# Altium PCB dc_power_backup_module_v1.PcbDoc (part 2 of 4)
Units mil, origin at the board's own origin, x right, y up, seen from the top; angles counter-clockwise.
Board outline 3300 x 2890 mil, 2 copper layers (Top Layer, Bottom Layer); 44 components, 21 nets, 171 pads, 32 vias.
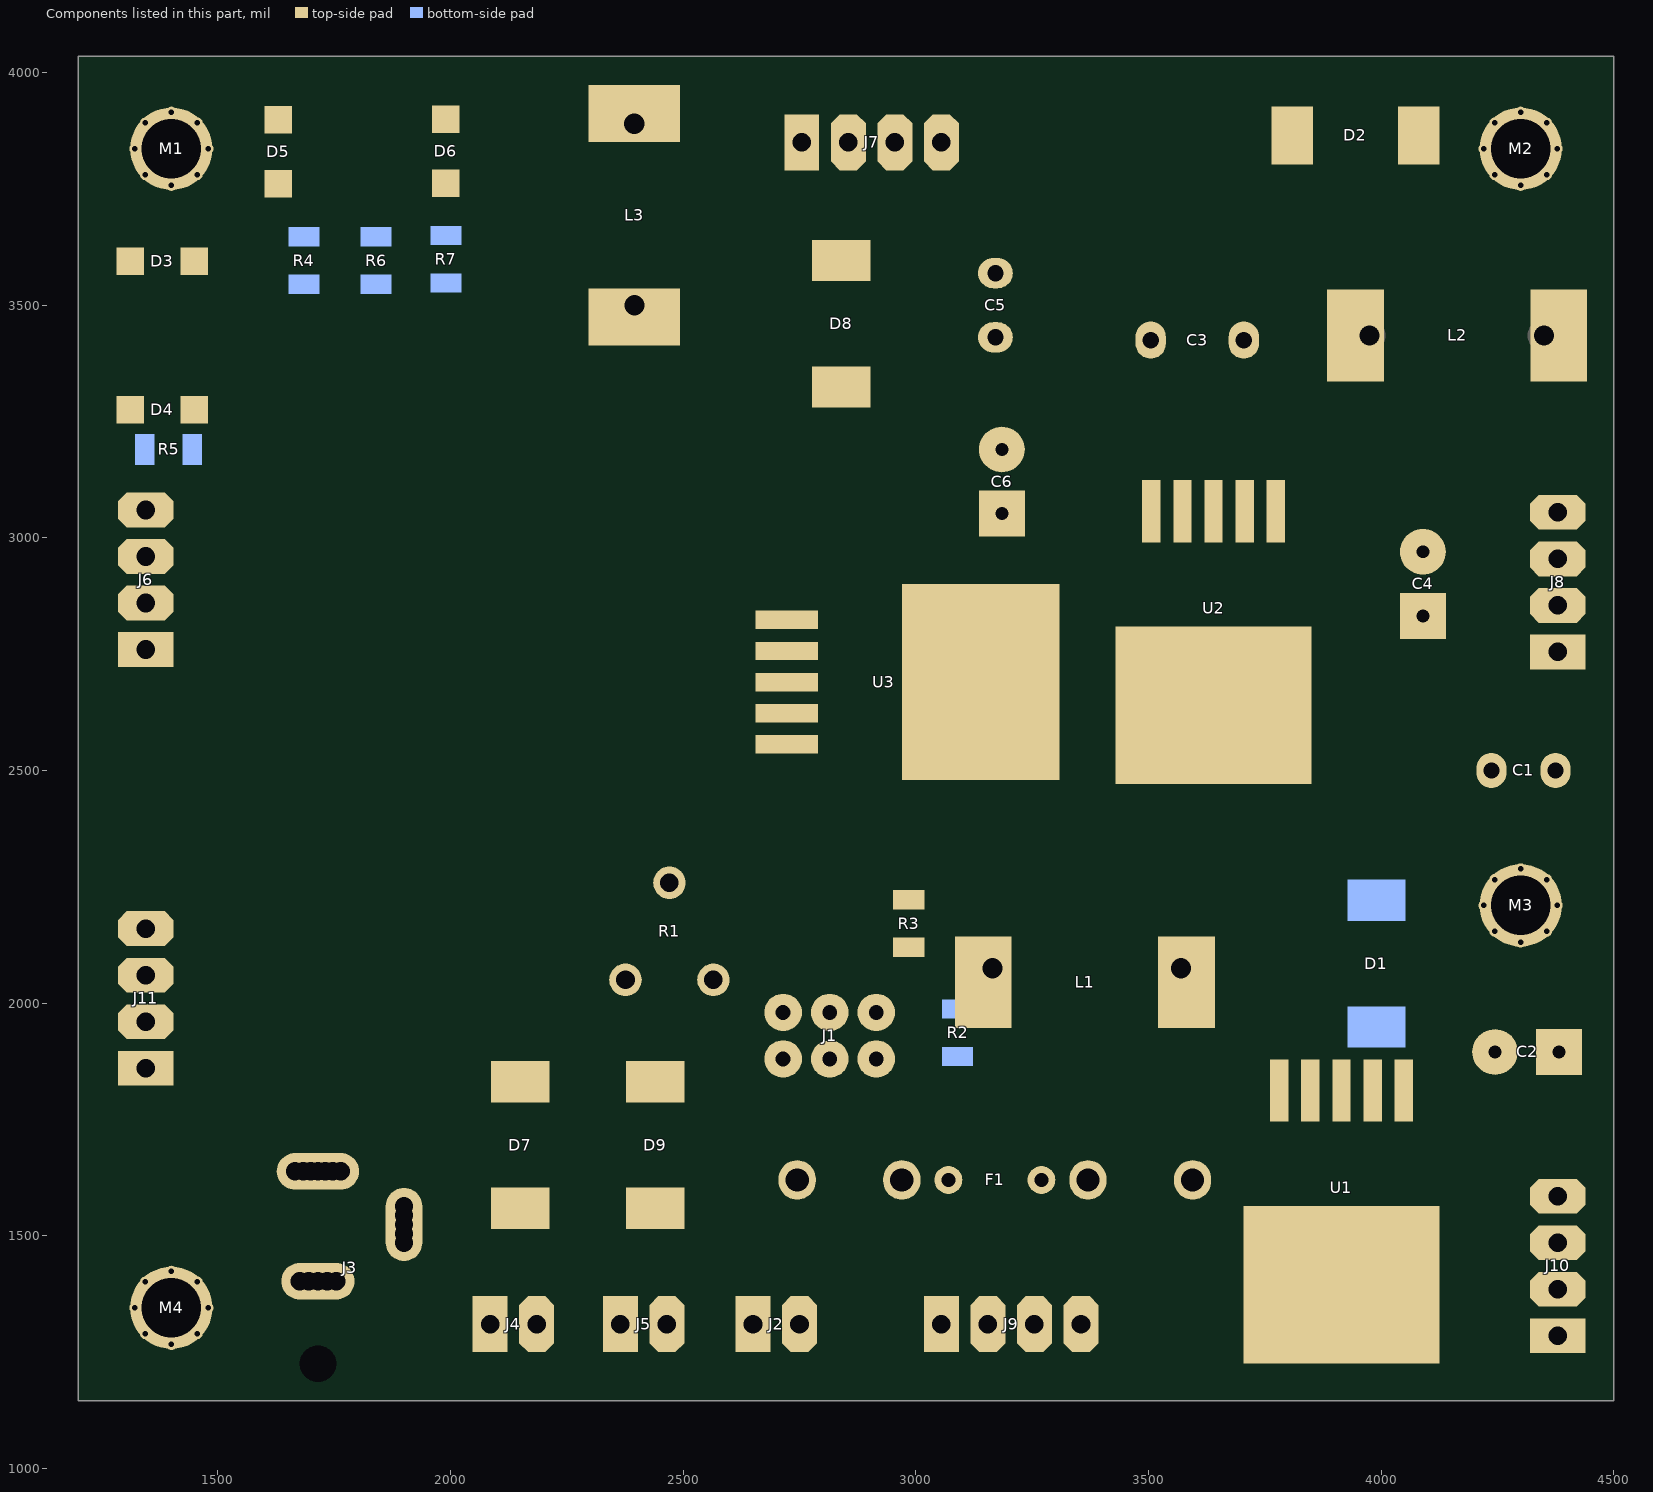
[diagram p2: the components of this part, seen from the top]

## Via types
v1: diameter 50, hole 28, Top Layer to Bottom Layer, 32 vias

## Nets (pads, with @x,y where several pads share a name; then routed paths per layer and width w, separated by ;. In a path a pad name is that pad's centre, name@x,y a point inside that pad or via, vN(x,y) a via of type N, cw(c..) or ccw(c..) an arc to the next point about the centre after c; other vN are vias at no path point) (continued)
copper on no net: (continued)
  Top Layer w0.3: 1926.2,2482.7 1930.7,2482.7 ; 1926.2,2483 1927.4,2483 ; 1926.5,2484.8 1927.1,2484.8 ; 1926.5,2485.1 1927.4,2485.1 ; 1926.5,2485.4 1927.4,2485.4 ; 1926.5,2485.7 1927.7,2485.7 ; 1926.5,2486 1927.7,2486 ; 1926.5,2486.3 1928,2486.3 ; 1926.5,2486.6 1928,2486.6 ; 1926.5,2486.9 1928.3,2486.9 ; 1926.5,2487.2 1928.6,2487.2 ; 1926.5,2487.5 1928.6,2487.5 ; 1926.8,2482.4 1933.7,2482.4 ; 1926.8,2487.8 1928.9,2487.8 ; 1926.8,2488.1 1928.9,2488.1 ; 1926.8,2488.4 1929.2,2488.4 ; 1926.8,2488.7 1929.5,2488.7 ; 1926.8,2489 1929.5,2489 ; 1926.8,2489.3 1929.8,2489.3 ; 1926.8,2489.6 1930.1,2489.6 ; 1926.8,2489.9 1930.1,2489.9 ; 1926.8,2490.2 1930.4,2490.2 ; 1926.8,2490.5 1930.7,2490.5 ; 1926.8,2490.8 1931,2490.8 ; 1927.1,2491.1 1931,2491.1 ; 1927.1,2491.4 1931.3,2491.4 ; 1927.1,2491.7 1931.6,2491.7 ; 1927.1,2492 1931.6,2492 ; 1927.1,2492.3 1931.9,2492.3 ; 1927.1,2492.6 1932.2,2492.6 ; 1927.1,2492.9 1932.5,2492.9 ; 1927.4,2482.1 1936.7,2482.1 ; 1927.4,2493.2 1932.8,2493.2 ; 1927.4,2493.5 1933.1,2493.5 ; 1927.4,2493.8 1933.1,2493.8 ; 1927.4,2494.1 1933.4,2494.1 ; 1927.4,2494.4 1933.7,2494.4 ; 1927.4,2494.7 1934,2494.7 ; 1927.7,2481.8 1940,2481.8 ; 1927.7,2495 1934.3,2495 ; 1927.7,2495.3 1934.6,2495.3 ; 1927.7,2495.6 1934.9,2495.6 ; 1927.7,2495.9 1935.5,2495.9 ; 1927.7,2496.2 1935.8,2496.2 ; 1927.7,2496.5 1936.1,2496.5 ; 1928,2496.8 1936.7,2496.8 ; 1928,2497.1 1937,2497.1 ; 1928,2497.4 1937.6,2497.4 ; 1928,2497.7 1938.2,2497.7 ; 1928,2498 1938.8,2498 ; 1928.3,2481.5 1943.3,2481.5 ; 1928.3,2498.3 1940,2498.3 ; 1928.3,2498.6 1967.3,2498.6 ; 1928.3,2498.9 1967.3,2498.9 ; 1928.3,2499.2 1967.3,2499.2 ; 1928.6,2499.5 1967,2499.5 ; 1928.6,2499.8 1967,2499.8 ; 1928.6,2500.1 1967,2500.1 ; 1928.6,2500.4 1966.7,2500.4 ; 1928.9,2481.2 1946.9,2481.2 ; 1928.9,2500.7 1966.7,2500.7 ; 1928.9,2501 1966.7,2501 ; 1928.9,2501.3 1966.4,2501.3 ; 1928.9,2501.6 1966.4,2501.6 ; 1929.2,2501.9 1966.1,2501.9 ; 1929.2,2502.2 1966.1,2502.2 ; 1929.2,2502.5 1966.1,2502.5 ; 1929.2,2502.8 1965.8,2502.8 ; 1929.5,2503.1 1965.8,2503.1 ; 1929.5,2503.4 1965.5,2503.4 ; 1929.5,2503.7 1965.5,2503.7 ; 1929.8,2480.9 1950.5,2480.9 ; 1929.8,2504 1965.5,2504 ; 1929.8,2504.3 1965.2,2504.3 ; 1929.8,2504.6 1965.2,2504.6 ; 1929.8,2504.9 1964.9,2504.9 ; 1930.1,2505.2 1964.9,2505.2 ; 1930.1,2505.5 1964.9,2505.5 ; 1930.1,2505.8 1964.6,2505.8 ; 1930.4,2480.6 1954.4,2480.6 ; 1930.4,2506.1 1964.6,2506.1 ; 1930.4,2506.4 1964.3,2506.4 ; 1930.4,2506.7 1964.3,2506.7 ; 1930.7,2507 1964.3,2507 ; 1930.7,2507.3 1964,2507.3 ; 1930.7,2507.6 1964,2507.6 ; 1931,2480.3 1972.4,2480.3 ; 1931,2507.9 1963.7,2507.9 ; 1931,2508.2 1963.7,2508.2 ; 1931,2508.5 1963.4,2508.5 ; 1931.3,2508.8 1963.4,2508.8 ; 1931.3,2509.1 1963.1,2509.1 ; 1931.6,2480 1972.4,2480 ; 1931.6,2509.4 1963.1,2509.4 ; 1931.6,2509.7 1962.8,2509.7 ; 1931.6,2510 1962.8,2510 ; 1931.9,2510.3 1962.5,2510.3 ; 1931.9,2510.6 1962.5,2510.6 ; 1932.2,2510.9 1962.2,2510.9 ; 1932.2,2511.2 1962.2,2511.2 ; 1932.2,2511.5 1961.9,2511.5 ; 1932.5,2479.7 1973.9,2479.7 ; 1932.5,2511.8 1961.9,2511.8 ; 1932.5,2512.1 1961.6,2512.1 ; 1932.8,2512.4 1961.6,2512.4 ; 1932.8,2512.7 1961.3,2512.7 ; 1933.1,2479.4 2066.6,2479.4 ; 1933.1,2513 1961,2513 ; 1933.1,2513.3 1961,2513.3 ; 1933.1,2513.6 1960.7,2513.6 ; 1933.4,2513.9 1960.7,2513.9 ; 1933.4,2514.2 1960.4,2514.2 ; 1933.7,2514.5 1960.4,2514.5 ; 1933.7,2514.8 1960.1,2514.8 ; 1934,2479.1 2065.1,2479.1 ; 1934,2515.1 1959.8,2515.1 ; 1934,2515.4 1959.8,2515.4 ; 1934.3,2515.7 1959.5,2515.7 ; 1934.6,2478.8 2063.6,2478.8 ; 1934.6,2516 1959.2,2516 ; 1934.6,2516.3 1959.2,2516.3 ; 1934.9,2516.6 1958.9,2516.6 ; 1934.9,2516.9 1958.6,2516.9 ; 1935.2,2517.2 1958.3,2517.2 ; 1935.2,2517.5 1958.3,2517.5 ; 1935.5,2478.5 2062.4,2478.5 ; 1935.5,2517.8 1958,2517.8 ; 1935.8,2518.1 1957.7,2518.1 ; 1935.8,2518.4 1957.4,2518.4 ; 1936.1,2518.7 1957.4,2518.7 ; 1936.4,2478.2 2060.9,2478.2 ; 1936.4,2519 1957.1,2519 ; 1936.4,2519.3 1956.8,2519.3 ; 1936.7,2519.6 1956.5,2519.6 ; 1937,2477.9 2059.4,2477.9 ; 1937,2519.9 1956.2,2519.9 ; 1937.3,2520.2 1955.9,2520.2 ; 1937.3,2520.5 1955.6,2520.5 ; 1937.6,2520.8 1955.3,2520.8 ; 1937.9,2477.6 2057.9,2477.6 ; 1937.9,2521.1 1955,2521.1 ; 1938.2,2521.4 1954.7,2521.4 ; 1938.5,2521.7 1954.4,2521.7 ; 1938.8,2477.3 2056.4,2477.3 ; 1938.8,2522 1954.1,2522 ; 1939.1,2522.3 1953.8,2522.3 ; 1939.4,2522.6 1953.2,2522.6 ; 1939.7,2477 2054.6,2477 ; 1939.7,2522.9 1952.9,2522.9 ; 1940,2523.2 1952.6,2523.2 ; 1940.6,2523.5 1952,2523.5 ; 1940.9,2476.7 2053.1,2476.7 ; 1940.9,2523.8 1951.7,2523.8 ; 1941.5,2524.1 1951.1,2524.1 ; 1942.1,2476.4 2051,2476.4 ; 1942.1,2498.3 1967.6,2498.3 ; 1942.1,2524.4 1950.5,2524.4 ; 1942.7,2524.7 1949.6,2524.7 ; 1943.3,2476.1 2048.9,2476.1 ; 1943.3,2498 1967.6,2498 ; 1943.3,2525 1949,2525 ; 1943.9,2497.7 1967.6,2497.7 ; 1944.5,2497.4 1967.9,2497.4 ; 1944.5,2525.3 1947.5,2525.3 ; 1944.8,2475.8 2046.8,2475.8 ; 1945.1,2497.1 1967.9,2497.1 ; 1945.7,2496.8 1967.9,2496.8 ; 1946,2496.5 1968.2,2496.5 ; 1946.3,2475.5 2044.4,2475.5 ; 1946.3,2496.2 1968.2,2496.2 ; 1946.6,2495.9 1968.2,2495.9 ; 1947.2,2495.6 1968.5,2495.6 ; 1947.5,2495.3 1968.5,2495.3 ; 1947.8,2495 1968.5,2495 ; 1948.1,2475.2 2041.7,2475.2 ; 1948.1,2494.4 1968.8,2494.4 ; 1948.1,2494.7 1968.8,2494.7 ; 1948.4,2494.1 1968.8,2494.1 ; 1948.7,2493.8 1968.8,2493.8 ; 1949,2493.5 1969.1,2493.5 ; 1949.3,2493.2 1969.1,2493.2 ; 1949.6,2492.9 1969.1,2492.9 ; 1949.9,2474.9 2039,2474.9 ; 1949.9,2492.3 1969.4,2492.3 ; 1949.9,2492.6 1969.4,2492.6 ; 1950.2,2492 1969.4,2492 ; 1950.5,2491.7 1969.7,2491.7 ; 1950.8,2491.1 1969.7,2491.1 ; 1950.8,2491.4 1969.7,2491.4 ; 1951.1,2490.8 1969.7,2490.8 ; 1951.4,2490.2 1970,2490.2 ; 1951.4,2490.5 1970,2490.5 ; 1951.7,2489.9 1970,2489.9 ; 1952,2489.6 1970,2489.6 ; 1952.3,2474.6 2036.3,2474.6 ; 1952.3,2489 1970.3,2489 ; 1952.3,2489.3 1970.3,2489.3 ; 1952.6,2488.4 1970.6,2488.4 ; 1952.6,2488.7 1970.3,2488.7 ; 1952.9,2488.1 1970.6,2488.1 ; 1953.2,2487.5 1970.6,2487.5 ; 1953.2,2487.8 1970.6,2487.8 ; 1953.5,2487.2 1970.9,2487.2 ; 1953.8,2486.6 1970.9,2486.6 ; 1953.8,2486.9 1970.9,2486.9 ; 1954.1,2486 1971.2,2486 ; 1954.1,2486.3 1970.9,2486.3 ; 1954.4,2485.7 1971.2,2485.7 ; 1954.7,2474.3 2033,2474.3 ; 1954.7,2485.1 1971.2,2485.1 ; 1954.7,2485.4 1971.2,2485.4 ; 1955,2484.5 1971.5,2484.5 ; 1955,2484.8 1971.5,2484.8 ; 1955.3,2483.9 1971.5,2483.9 ; 1955.3,2484.2 1971.5,2484.2 ; 1955.6,2483.6 1971.8,2483.6 ; 1955.9,2483 1971.8,2483 ; 1955.9,2483.3 1971.8,2483.3 ; 1956.2,2482.4 1972.1,2482.4 ; 1956.2,2482.7 1971.8,2482.7 ; 1956.5,2481.8 1972.1,2481.8 ; 1956.5,2482.1 1972.1,2482.1 ; 1956.8,2481.2 1972.4,2481.2 ; 1956.8,2481.5 1972.1,2481.5 ; 1957.1,2480.6 1972.4,2480.6 ; 1957.1,2480.9 1972.4,2480.9 ; 1957.4,2474 2029.7,2474 ; 1960.4,2473.4 2021.9,2473.4 ; 1960.4,2473.7 2026.1,2473.7 ; 1960.7,2472.5 1974.2,2472.5 ; 1960.7,2472.8 1973.9,2472.8 ; 1960.7,2473.1 2017.4,2473.1 ; 1961,2471.6 1974.2,2471.6 ; 1961,2471.9 1974.2,2471.9 ; 1961,2472.2 1974.2,2472.2 ; 1961.3,2471 1974.5,2471 ; 1961.3,2471.3 1974.2,2471.3 ; 1961.6,2470.1 1974.5,2470.1 ; 1961.6,2470.4 1974.5,2470.4 ; 1961.6,2470.7 1974.5,2470.7 ; 1961.9,2469.2 1974.8,2469.2 ; 1961.9,2469.5 1974.8,2469.5 ; 1961.9,2469.8 1974.5,2469.8 ; 1962.2,2468.3 1974.8,2468.3 ; 1962.2,2468.6 1974.8,2468.6 ; 1962.2,2468.9 1974.8,2468.9 ; 1962.5,2467.4 1975.1,2467.4 ; 1962.5,2467.7 1975.1,2467.7 ; 1962.5,2468 1974.8,2468 ; 1962.8,2466.5 1975.1,2466.5 ; 1962.8,2466.8 1975.1,2466.8 ; 1962.8,2467.1 1975.1,2467.1 ; 1963.1,2465.6 1975.4,2465.6 ; 1963.1,2465.9 1975.4,2465.9 ; 1963.1,2466.2 1975.1,2466.2 ; 1963.4,2464.7 1975.4,2464.7 ; 1963.4,2465 1975.4,2465 ; 1963.4,2465.3 1975.4,2465.3 ; 1963.7,2463.8 1975.7,2463.8 ; 1963.7,2464.1 1975.7,2464.1 ; 1963.7,2464.4 1975.4,2464.4 ; 1964,2462.9 1975.7,2462.9 ; 1964,2463.2 1975.7,2463.2 ; 1964,2463.5 1975.7,2463.5 ; 1964.3,2461.7 1976,2461.7 ; 1964.3,2462 1976,2462 ; 1964.3,2462.3 1976,2462.3 ; 1964.3,2462.6 1975.7,2462.6 ; 1964.6,2460.8 1976,2460.8 ; 1964.6,2461.1 1976,2461.1 ; 1964.6,2461.4 1976,2461.4 ; 1964.9,2459.6 1976.3,2459.6 ; 1964.9,2459.9 1976.3,2459.9 ; 1964.9,2460.2 1976.3,2460.2 ; 1964.9,2460.5 1976.3,2460.5 ; 1965.2,2458.7 1976.6,2458.7 ; 1965.2,2459 1976.3,2459 ; 1965.2,2459.3 1976.3,2459.3 ; 1965.5,2457.5 1976.6,2457.5 ; 1965.5,2457.8 1976.6,2457.8 ; 1965.5,2458.1 1976.6,2458.1 ; 1965.5,2458.4 1976.6,2458.4 ; 1965.8,2456.3 1976.9,2456.3 ; 1965.8,2456.6 1976.9,2456.6 ; 1965.8,2456.9 1976.6,2456.9 ; 1965.8,2457.2 1976.6,2457.2 ; 1966.1,2455.1 1976.9,2455.1 ; 1966.1,2455.4 1976.9,2455.4 ; 1966.1,2455.7 1976.9,2455.7 ; 1966.1,2456 1976.9,2456 ; 1966.4,2453.9 1977.2,2453.9 ; 1966.4,2454.2 1977.2,2454.2 ; 1966.4,2454.5 1977.2,2454.5 ; 1966.4,2454.8 1976.9,2454.8 ; 1966.7,2452.7 1977.2,2452.7 ; 1966.7,2453 1977.2,2453 ; 1966.7,2453.3 1977.2,2453.3 ; 1966.7,2453.6 1977.2,2453.6 ; 1967,2451.5 1977.5,2451.5 ; 1967,2451.8 1977.5,2451.8 ; 1967,2452.1 1977.5,2452.1 ; 1967,2452.4 1977.5,2452.4 ; 1967.3,2450.3 1977.5,2450.3 ; 1967.3,2450.6 1977.5,2450.6 ; 1967.3,2450.9 1977.5,2450.9 ; 1967.3,2451.2 1977.5,2451.2 ; 1967.6,2448.8 1977.8,2448.8 ; 1967.6,2449.1 1977.8,2449.1 ; 1967.6,2449.4 1977.8,2449.4 ; 1967.6,2449.7 1977.8,2449.7 ; 1967.6,2450 1977.8,2450 ; 1967.9,2447.6 1978.1,2447.6 ; 1967.9,2447.9 1977.8,2447.9 ; 1967.9,2448.2 1977.8,2448.2 ; 1967.9,2448.5 1977.8,2448.5 ; 1968.2,2446.1 1978.1,2446.1 ; 1968.2,2446.4 1978.1,2446.4 ; 1968.2,2446.7 1978.1,2446.7 ; 1968.2,2447 1978.1,2447 ; 1968.2,2447.3 1978.1,2447.3 ; 1968.5,2444.9 1978.4,2444.9 ; 1968.5,2445.2 1978.4,2445.2 ; 1968.5,2445.5 1978.1,2445.5 ; 1968.5,2445.8 1978.1,2445.8 ; 1968.8,2443.4 1978.4,2443.4 ; 1968.8,2443.7 1978.4,2443.7 ; 1968.8,2444 1978.4,2444 ; 1968.8,2444.3 1978.4,2444.3 ; 1968.8,2444.6 1978.4,2444.6 ; 1969.1,2441.9 1978.7,2441.9 ; 1969.1,2442.2 1978.7,2442.2 ; 1969.1,2442.5 1978.7,2442.5 ; 1969.1,2442.8 1978.7,2442.8 ; 1969.1,2443.1 1978.4,2443.1 ; 1969.4,2440.1 1978.7,2440.1 ; 1969.4,2440.4 1978.7,2440.4 ; 1969.4,2440.7 1978.7,2440.7 ; 1969.4,2441 1978.7,2441 ; 1969.4,2441.3 1978.7,2441.3 ; 1969.4,2441.6 1978.7,2441.6 ; 1969.7,2438.6 1979,2438.6 ; 1969.7,2438.9 1979,2438.9 ; 1969.7,2439.2 1979,2439.2 ; 1969.7,2439.5 1979,2439.5 ; 1969.7,2439.8 1979,2439.8 ; 1970,2437.1 1979.3,2437.1 ; 1970,2437.4 1979,2437.4 ; 1970,2437.7 1979,2437.7 ; 1970,2438 1979,2438 ; 1970,2438.3 1979,2438.3 ; 1970.3,2435.3 1979.3,2435.3 ; 1970.3,2435.6 1979.3,2435.6 ; 1970.3,2435.9 1979.3,2435.9 ; 1970.3,2436.2 1979.3,2436.2 ; 1970.3,2436.5 1979.3,2436.5 ; 1970.3,2436.8 1979.3,2436.8 ; 1970.6,2433.5 1979.6,2433.5 ; 1970.6,2433.8 1979.6,2433.8 ; 1970.6,2434.1 1979.6,2434.1 ; 1970.6,2434.4 1979.3,2434.4 ; 1970.6,2434.7 1979.3,2434.7 ; 1970.6,2435 1979.3,2435 ; 1970.9,2431.7 1979.6,2431.7 ; 1970.9,2432 1979.6,2432 ; 1970.9,2432.3 1979.6,2432.3 ; 1970.9,2432.6 1979.6,2432.6 ; 1970.9,2432.9 1979.6,2432.9 ; 1970.9,2433.2 1979.6,2433.2 ; 1971.2,2328.5 1971.5,2328.5 ; 1971.2,2328.8 1971.5,2328.8 ; 1971.2,2329.1 1971.8,2329.1 ; 1971.2,2329.4 1971.8,2329.4 ; 1971.2,2329.7 1972.1,2329.7 ; 1971.2,2330 1972.1,2330 ; 1971.2,2330.3 1972.4,2330.3 ; 1971.2,2330.6 1972.4,2330.6 ; 1971.2,2330.9 1972.7,2330.9 ; 1971.2,2331.2 1972.7,2331.2 ; 1971.2,2331.5 1973,2331.5 ; 1971.2,2331.8 1973,2331.8 ; 1971.2,2332.1 1973,2332.1 ; 1971.2,2332.4 1973.3,2332.4 ; 1971.2,2332.7 1973.3,2332.7 ; 1971.2,2333 1973.6,2333 ; 1971.2,2429.9 1979.9,2429.9 ; 1971.2,2430.2 1979.9,2430.2 ; 1971.2,2430.5 1979.9,2430.5 ; 1971.2,2430.8 1979.9,2430.8 ; 1971.2,2431.1 1979.6,2431.1 ; 1971.2,2431.4 1979.6,2431.4 ; 1971.5,2333.3 1973.6,2333.3 ; 1971.5,2333.6 1973.6,2333.6 ; 1971.5,2333.9 1973.9,2333.9 ; 1971.5,2334.2 1973.9,2334.2 ; 1971.5,2334.5 1973.9,2334.5 ; 1971.5,2334.8 1974.2,2334.8 ; 1971.5,2335.1 1974.2,2335.1 ; 1971.5,2427.8 1979.9,2427.8 ; 1971.5,2428.1 1979.9,2428.1 ; 1971.5,2428.4 1979.9,2428.4 ; 1971.5,2428.7 1979.9,2428.7 ; 1971.5,2429 1979.9,2429 ; 1971.5,2429.3 1979.9,2429.3 ; 1971.5,2429.6 1979.9,2429.6 ; 1971.8,2335.4 1974.2,2335.4 ; 1971.8,2335.7 1974.5,2335.7 ; 1971.8,2336 1974.5,2336 ; 1971.8,2336.3 1974.5,2336.3 ; 1971.8,2336.6 1974.8,2336.6 ; 1971.8,2336.9 1974.8,2336.9 ; 1971.8,2425.7 1980.2,2425.7 ; 1971.8,2426 1980.2,2426 ; 1971.8,2426.3 1980.2,2426.3 ; 1971.8,2426.6 1980.2,2426.6 ; 1971.8,2426.9 1980.2,2426.9 ; 1971.8,2427.2 1980.2,2427.2 ; 1971.8,2427.5 1979.9,2427.5 ; 1972.1,2337.2 1974.8,2337.2 ; 1972.1,2337.5 1975.1,2337.5 ; 1972.1,2337.8 1975.1,2337.8 ; 1972.1,2338.1 1975.1,2338.1 ; 1972.1,2338.4 1975.1,2338.4 ; 1972.1,2338.7 1975.4,2338.7 ; 1972.1,2423.6 1980.2,2423.6 ; 1972.1,2423.9 1980.2,2423.9 ; 1972.1,2424.2 1980.2,2424.2 ; 1972.1,2424.5 1980.2,2424.5 ; 1972.1,2424.8 1980.2,2424.8 ; 1972.1,2425.1 1980.2,2425.1 ; 1972.1,2425.4 1980.2,2425.4 ; 1972.4,2339 1975.4,2339 ; 1972.4,2339.3 1975.4,2339.3 ; 1972.4,2339.6 1975.4,2339.6 ; 1972.4,2339.9 1975.7,2339.9 ; 1972.4,2340.2 1975.7,2340.2 ; 1972.4,2340.5 1975.7,2340.5 ; 1972.4,2421.5 1980.5,2421.5 ; 1972.4,2421.8 1980.5,2421.8 ; 1972.4,2422.1 1980.5,2422.1 ; 1972.4,2422.4 1980.5,2422.4 ; 1972.4,2422.7 1980.5,2422.7 ; 1972.4,2423 1980.5,2423 ; 1972.4,2423.3 1980.5,2423.3 ; 1972.7,2340.8 1975.7,2340.8 ; 1972.7,2341.1 1976,2341.1 ; 1972.7,2341.4 1976,2341.4 ; 1972.7,2341.7 1976,2341.7 ; 1972.7,2342 1976,2342 ; 1972.7,2342.3 1976.3,2342.3 ; 1972.7,2419.1 1980.5,2419.1 ; 1972.7,2419.4 1980.5,2419.4 ; 1972.7,2419.7 1980.5,2419.7 ; 1972.7,2420 1980.5,2420 ; 1972.7,2420.3 1980.5,2420.3 ; 1972.7,2420.6 1980.5,2420.6 ; 1972.7,2420.9 1980.5,2420.9 ; 1972.7,2421.2 1980.5,2421.2 ; 1973,2342.6 1976.3,2342.6 ; 1973,2342.9 1976.3,2342.9 ; 1973,2343.2 1976.3,2343.2 ; 1973,2343.5 1976.6,2343.5 ; 1973,2343.8 1976.6,2343.8 ; 1973,2344.1 1976.6,2344.1 ; 1973,2416.7 1980.8,2416.7 ; 1973,2417 1980.8,2417 ; 1973,2417.3 1980.8,2417.3 ; 1973,2417.6 1980.8,2417.6 ; 1973,2417.9 1980.8,2417.9 ; 1973,2418.2 1980.8,2418.2 ; 1973,2418.5 1980.8,2418.5 ; 1973,2418.8 1980.8,2418.8 ; 1973.3,2344.4 1976.6,2344.4 ; 1973.3,2344.7 1976.6,2344.7 ; 1973.3,2345 1976.9,2345 ; 1973.3,2345.3 1976.9,2345.3 ; 1973.3,2345.6 1976.9,2345.6 ; 1973.3,2345.9 1976.9,2345.9 ; 1973.3,2414 1980.8,2414 ; 1973.3,2414.3 1980.8,2414.3 ; 1973.3,2414.6 1980.8,2414.6 ; 1973.3,2414.9 1980.8,2414.9 ; 1973.3,2415.2 1980.8,2415.2 ; 1973.3,2415.5 1980.8,2415.5 ; 1973.3,2415.8 1980.8,2415.8 ; 1973.3,2416.1 1980.8,2416.1 ; 1973.3,2416.4 1980.8,2416.4 ; 1973.6,2346.2 1976.9,2346.2 ; 1973.6,2346.5 1977.2,2346.5 ; 1973.6,2346.8 1977.2,2346.8 ; 1973.6,2347.1 1977.2,2347.1 ; 1973.6,2347.4 1977.2,2347.4 ; 1973.6,2347.7 1977.2,2347.7 ; 1973.6,2411.3 1981.1,2411.3 ; 1973.6,2411.6 1981.1,2411.6 ; 1973.6,2411.9 1981.1,2411.9 ; 1973.6,2412.2 1981.1,2412.2 ; 1973.6,2412.5 1981.1,2412.5 ; 1973.6,2412.8 1981.1,2412.8 ; 1973.6,2413.1 1981.1,2413.1 ; 1973.6,2413.4 1981.1,2413.4 ; 1973.6,2413.7 1981.1,2413.7 ; 1973.9,2348 1977.5,2348 ; 1973.9,2348.3 1977.5,2348.3 ; 1973.9,2348.6 1977.5,2348.6 ; 1973.9,2348.9 1977.5,2348.9 ; 1973.9,2349.2 1977.5,2349.2 ; 1973.9,2349.5 1977.5,2349.5 ; 1973.9,2349.8 1977.8,2349.8 ; 1973.9,2408.3 1981.1,2408.3 ; 1973.9,2408.6 1981.1,2408.6 ; 1973.9,2408.9 1981.1,2408.9 ; 1973.9,2409.2 1981.1,2409.2 ; 1973.9,2409.5 1981.1,2409.5 ; 1973.9,2409.8 1981.1,2409.8 ; 1973.9,2410.1 1981.1,2410.1 ; 1973.9,2410.4 1981.1,2410.4 ; 1973.9,2410.7 1981.1,2410.7 ; 1973.9,2411 1981.1,2411 ; 1974.2,2350.1 1977.8,2350.1 ; 1974.2,2350.4 1977.8,2350.4 ; 1974.2,2350.7 1977.8,2350.7 ; 1974.2,2351 1977.8,2351 ; 1974.2,2351.3 1977.8,2351.3 ; 1974.2,2351.6 1978.1,2351.6 ; 1974.2,2351.9 1978.1,2351.9 ; 1974.2,2352.2 1978.1,2352.2 ; 1974.2,2405 1981.4,2405 ; 1974.2,2405.3 1981.4,2405.3 ; 1974.2,2405.6 1981.4,2405.6 ; 1974.2,2405.9 1981.4,2405.9 ; 1974.2,2406.2 1981.4,2406.2 ; 1974.2,2406.5 1981.4,2406.5 ; 1974.2,2406.8 1981.4,2406.8 ; 1974.2,2407.1 1981.1,2407.1 ; 1974.2,2407.4 1981.1,2407.4 ; 1974.2,2407.7 1981.1,2407.7 ; 1974.2,2408 1981.1,2408 ; 1974.5,2352.5 1978.1,2352.5 ; 1974.5,2352.8 1978.1,2352.8 ; 1974.5,2353.1 1978.1,2353.1 ; 1974.5,2353.4 1978.4,2353.4 ; 1974.5,2353.7 1978.4,2353.7 ; 1974.5,2354 1978.4,2354 ; 1974.5,2354.3 1978.4,2354.3 ; 1974.5,2354.6 1978.4,2354.6 ; 1974.5,2354.9 1978.4,2354.9 ; 1974.5,2355.2 1978.4,2355.2 ; 1974.5,2355.5 1978.7,2355.5 ; 1974.5,2401.4 1981.4,2401.4 ; 1974.5,2401.7 1981.4,2401.7 ; 1974.5,2402 1981.4,2402 ; 1974.5,2402.3 1981.4,2402.3 ; 1974.5,2402.6 1981.4,2402.6 ; 1974.5,2402.9 1981.4,2402.9 ; 1974.5,2403.2 1981.4,2403.2 ; 1974.5,2403.5 1981.4,2403.5 ; 1974.5,2403.8 1981.4,2403.8 ; 1974.5,2404.1 1981.4,2404.1 ; 1974.5,2404.4 1981.4,2404.4 ; 1974.5,2404.7 1981.4,2404.7 ; 1974.8,2355.8 1978.7,2355.8 ; 1974.8,2356.1 1978.7,2356.1 ; 1974.8,2356.4 1978.7,2356.4 ; 1974.8,2356.7 1978.7,2356.7 ; 1974.8,2357 1978.7,2357 ; 1974.8,2357.3 1978.7,2357.3 ; 1974.8,2357.6 1979,2357.6 ; 1974.8,2357.9 1979,2357.9 ; 1974.8,2358.2 1979,2358.2 ; 1974.8,2358.5 1979,2358.5 ; 1974.8,2358.8 1979,2358.8 ; 1974.8,2359.1 1979,2359.1 ; 1974.8,2359.4 1979,2359.4 ; 1974.8,2359.7 1979,2359.7 ; 1974.8,2360 1979.3,2360 ; 1974.8,2360.3 1979.3,2360.3 ; 1974.8,2397.2 1981.4,2397.2 ; 1974.8,2397.5 1981.4,2397.5 ; 1974.8,2397.8 1981.4,2397.8 ; 1974.8,2398.1 1981.4,2398.1 ; 1974.8,2398.4 1981.4,2398.4 ; 1974.8,2398.7 1981.4,2398.7 ; 1974.8,2399 1981.4,2399 ; 1974.8,2399.3 1981.4,2399.3 ; 1974.8,2399.6 1981.4,2399.6 ; 1974.8,2399.9 1981.4,2399.9 ; 1974.8,2400.2 1981.4,2400.2 ; 1974.8,2400.5 1981.4,2400.5 ; 1974.8,2400.8 1981.4,2400.8 ; 1974.8,2401.1 1981.4,2401.1 ; 1975.1,2360.6 1979.3,2360.6 ; 1975.1,2360.9 1979.3,2360.9 ; 1975.1,2361.2 1979.3,2361.2 ; 1975.1,2361.5 1979.3,2361.5 ; 1975.1,2361.8 1979.3,2361.8 ; 1975.1,2362.1 1979.3,2362.1 ; 1975.1,2362.4 1979.6,2362.4 ; 1975.1,2362.7 1979.6,2362.7 ; 1975.1,2363 1979.6,2363 ; 1975.1,2363.3 1979.6,2363.3 ; 1975.1,2363.6 1979.6,2363.6 ; 1975.1,2363.9 1979.6,2363.9 ; 1975.1,2364.2 1979.6,2364.2 ; 1975.1,2364.5 1979.6,2364.5 ; 1975.1,2364.8 1979.6,2364.8 ; 1975.1,2365.1 1979.9,2365.1 ; 1975.1,2365.4 1979.9,2365.4 ; 1975.1,2365.7 1979.9,2365.7 ; 1975.1,2366 1979.9,2366 ; 1975.1,2366.3 1979.9,2366.3 ; 1975.1,2391.8 1981.4,2391.8 ; 1975.1,2392.1 1981.4,2392.1 ; 1975.1,2392.4 1981.4,2392.4 ; 1975.1,2392.7 1981.4,2392.7 ; 1975.1,2393 1981.4,2393 ; 1975.1,2393.3 1981.4,2393.3 ; 1975.1,2393.6 1981.4,2393.6 ; 1975.1,2393.9 1981.4,2393.9 ; 1975.1,2394.2 1981.4,2394.2 ; 1975.1,2394.5 1981.4,2394.5 ; 1975.1,2394.8 1981.4,2394.8 ; 1975.1,2395.1 1981.4,2395.1 ; 1975.1,2395.4 1981.4,2395.4 ; 1975.1,2395.7 1981.4,2395.7 ; 1975.1,2396 1981.4,2396 ; 1975.1,2396.3 1981.4,2396.3 ; 1975.1,2396.6 1981.4,2396.6 ; 1975.1,2396.9 1981.4,2396.9 ; 1975.4,2366.6 1979.9,2366.6 ; 1975.4,2366.9 1979.9,2366.9 ; 1975.4,2367.2 1979.9,2367.2 ; 1975.4,2367.5 1979.9,2367.5 ; 1975.4,2367.8 1979.9,2367.8 ; 1975.4,2368.1 1980.2,2368.1 ; 1975.4,2368.4 1980.2,2368.4 ; 1975.4,2368.7 1980.2,2368.7 ; 1975.4,2369 1980.2,2369 ; 1975.4,2369.3 1980.2,2369.3 ; 1975.4,2369.6 1980.2,2369.6 ; 1975.4,2369.9 1980.2,2369.9 ; 1975.4,2370.2 1980.2,2370.2 ; 1975.4,2370.5 1980.2,2370.5 ; 1975.4,2370.8 1980.2,2370.8 ; 1975.4,2371.1 1980.2,2371.1 ; 1975.4,2371.4 1980.2,2371.4 ; 1975.4,2371.7 1980.5,2371.7 ; 1975.4,2372 1980.5,2372 ; 1975.4,2372.3 1980.5,2372.3 ; 1975.4,2372.6 1980.5,2372.6 ; 1975.4,2372.9 1980.5,2372.9 ; 1975.4,2373.2 1980.5,2373.2 ; 1975.4,2373.5 1980.5,2373.5 ; 1975.4,2373.8 1980.5,2373.8 ; 1975.4,2374.1 1980.5,2374.1 ; 1975.4,2374.4 1980.5,2374.4 ; 1975.4,2374.7 1980.5,2374.7 ; 1975.4,2375 1980.5,2375 ; 1975.4,2375.3 1980.8,2375.3 ; 1975.4,2375.6 1980.8,2375.6 ; 1975.4,2375.9 1980.8,2375.9 ; 1975.4,2376.2 1980.8,2376.2 ; 1975.4,2376.5 1980.8,2376.5 ; 1975.4,2376.8 1980.8,2376.8 ; 1975.4,2377.1 1980.8,2377.1 ; 1975.4,2377.4 1980.8,2377.4 ; 1975.4,2377.7 1980.8,2377.7 ; 1975.4,2378 1980.8,2378 ; 1975.4,2378.3 1980.8,2378.3 ; 1975.4,2378.6 1980.8,2378.6 ; 1975.4,2378.9 1980.8,2378.9 ; 1975.4,2379.2 1980.8,2379.2 ; 1975.4,2379.5 1980.8,2379.5 ; 1975.4,2379.8 1981.1,2379.8 ; 1975.4,2380.1 1981.1,2380.1 ; 1975.4,2380.4 1981.1,2380.4 ; 1975.4,2380.7 1981.1,2380.7 ; 1975.4,2381 1981.1,2381 ; 1975.4,2381.3 1981.1,2381.3 ; 1975.4,2381.6 1981.1,2381.6 ; 1975.4,2381.9 1981.1,2381.9 ; 1975.4,2382.2 1981.1,2382.2 ; 1975.4,2382.5 1981.1,2382.5 ; 1975.4,2382.8 1981.1,2382.8 ; 1975.4,2383.1 1981.1,2383.1 ; 1975.4,2383.4 1981.1,2383.4 ; 1975.4,2383.7 1981.1,2383.7 ; 1975.4,2384 1981.1,2384 ; 1975.4,2384.3 1981.1,2384.3 ; 1975.4,2384.6 1981.1,2384.6 ; 1975.4,2384.9 1981.1,2384.9 ; 1975.4,2385.2 1981.1,2385.2 ; 1975.4,2385.5 1981.1,2385.5 ; 1975.4,2385.8 1981.4,2385.8 ; 1975.4,2386.1 1981.4,2386.1 ; 1975.4,2386.4 1981.4,2386.4 ; 1975.4,2386.7 1981.4,2386.7 ; 1975.4,2387 1981.4,2387 ; 1975.4,2387.3 1981.4,2387.3 ; 1975.4,2387.6 1981.4,2387.6 ; 1975.4,2387.9 1981.4,2387.9 ; 1975.4,2388.2 1981.4,2388.2 ; 1975.4,2388.5 1981.4,2388.5 ; 1975.4,2388.8 1981.4,2388.8 ; 1975.4,2389.1 1981.4,2389.1 ; 1975.4,2389.4 1981.4,2389.4 ; 1975.4,2389.7 1981.4,2389.7 ; 1975.4,2390 1981.4,2390 ; 1975.4,2390.3 1981.4,2390.3 ; 1975.4,2390.6 1981.4,2390.6 ; 1975.4,2390.9 1981.4,2390.9 ; 1975.4,2391.2 1981.4,2391.2 ; 1975.4,2391.5 1981.4,2391.5 ; 1976,2472.8 2012,2472.8 ; 1979,2463.5 1980.8,2463.5 ; 1979.3,2463.2 1984.1,2463.2 ; 1979.9,2462.9 1987.4,2462.9 ; 1980.5,2462.6 1990.7,2462.6 ; 1981.1,2462.3 1994.6,2462.3 ; 1981.7,2462 1998.5,2462 ; 1982.6,2461.7 2003.6,2461.7 ; 1982.9,2479.7 2067.8,2479.7 ; 1983.5,2461.4 2011.1,2461.4 ; 1984.4,2461.1 2124.2,2461.1 ; 1985.3,2460.8 2122.7,2460.8 ; 1986.5,2460.5 2120.9,2460.5 ; 1987.1,2472.5 2004.5,2472.5 ; 1987.4,2460.2 2119.4,2460.2 ; 1988.6,2459.9 2117.6,2459.9 ; 1989.5,2459.6 2115.8,2459.6 ; 1990.7,2459.3 2114.3,2459.3 ; 1991.3,2480 2069.3,2480 ; 1991.9,2321 2002.1,2321 ; 1991.9,2321.3 2002.1,2321.3 ; 1992.2,2332.4 2000.9,2332.4 ; 1992.2,2332.7 2000.9,2332.7 ; 1992.2,2333 2000.9,2333 ; 1992.2,2333.3 2000.9,2333.3 ; 1992.2,2333.6 2000.9,2333.6 ; 1992.2,2342.9 2000.9,2342.9 ; 1992.2,2343.2 2000.9,2343.2 ; 1992.2,2343.5 2000.9,2343.5 ; 1992.2,2343.8 2000.9,2343.8 ; 1992.2,2459 2112.5,2459 ; 1992.5,2331.5 2000.6,2331.5 ; 1992.5,2331.8 2000.6,2331.8 ; 1992.5,2332.1 2000.9,2332.1 ; 1992.5,2333.9 2000.9,2333.9 ; 1992.5,2334.2 2000.6,2334.2 ; 1992.5,2334.5 2000.6,2334.5 ; 1992.5,2334.8 2000.6,2334.8 ; 1992.5,2341.7 2000.6,2341.7 ; 1992.5,2342 2000.6,2342 ; 1992.5,2342.3 2000.6,2342.3 ; 1992.5,2342.6 2000.9,2342.6 ; 1992.5,2344.1 2000.9,2344.1 ; 1992.5,2344.4 2000.9,2344.4 ; 1992.5,2344.7 2000.6,2344.7 ; 1992.5,2345 2000.6,2345 ; 1992.8,2320.7 2002.1,2320.7 ; 1992.8,2330.9 2000.3,2330.9 ; 1992.8,2331.2 2000.6,2331.2 ; 1992.8,2335.1 2000.3,2335.1 ; 1992.8,2335.4 2000.3,2335.4 ; 1992.8,2341.1 2000.3,2341.1 ; 1992.8,2341.4 2000.3,2341.4 ; 1992.8,2345.3 2000.6,2345.3 ; 1992.8,2345.6 2000.3,2345.6 ; 1993.1,2330.6 2000,2330.6 ; 1993.1,2335.7 2000,2335.7 ; 1993.1,2340.8 2000,2340.8 ; 1993.1,2345.9 2000,2345.9 ; 1993.4,2309 1996.1,2309 ; 1993.4,2309.3 1995.8,2309.3 ; 1993.4,2320.1 1995.8,2320.1 ; 1993.4,2320.4 2002.1,2320.4 ; 1993.4,2330 1999.7,2330 ; 1993.4,2330.3 2000,2330.3 ; 1993.4,2336 1999.7,2336 ; 1993.4,2340.5 1999.7,2340.5 ; 1993.4,2346.2 2000,2346.2 ; 1993.4,2346.5 1999.7,2346.5 ; 1993.4,2458.7 2110.7,2458.7 ; 1993.7,2309.6 1995.8,2309.6 ; 1993.7,2309.9 1995.8,2309.9 ; 1993.7,2310.2 1995.8,2310.2 ; 1993.7,2310.5 1995.8,2310.5 ; 1993.7,2310.8 1995.8,2310.8 ; 1993.7,2311.1 1995.8,2311.1 ; 1993.7,2311.4 1995.8,2311.4 ; 1993.7,2311.7 1995.8,2311.7 ; 1993.7,2312 1995.8,2312 ; 1993.7,2312.3 1995.8,2312.3 ; 1993.7,2312.6 1995.8,2312.6 ; 1993.7,2312.9 1995.8,2312.9 ; 1993.7,2313.2 1995.8,2313.2 ; 1993.7,2313.5 1995.8,2313.5 ; 1993.7,2313.8 1995.8,2313.8 ; 1993.7,2314.1 1995.8,2314.1 ; 1993.7,2314.4 1995.8,2314.4 ; 1993.7,2314.7 2001.2,2314.7 ; 1993.7,2315 2001.2,2315 ; 1993.7,2315.3 2001.2,2315.3 ; 1993.7,2315.6 1995.8,2315.6 ; 1993.7,2315.9 1995.8,2315.9 ; 1993.7,2316.2 1995.8,2316.2 ; 1993.7,2316.5 1995.8,2316.5 ; 1993.7,2316.8 1995.8,2316.8 ; 1993.7,2317.1 1995.8,2317.1 ; 1993.7,2317.4 1995.8,2317.4 ; 1993.7,2317.7 1995.8,2317.7 ; 1993.7,2318 1995.8,2318 ; 1993.7,2318.3 1995.8,2318.3 ; 1993.7,2318.6 1995.8,2318.6 ; 1993.7,2318.9 1995.8,2318.9 ; 1993.7,2319.2 1995.8,2319.2 ; 1993.7,2319.5 1995.8,2319.5 ; 1993.7,2319.8 1995.8,2319.8 ; 1993.7,2336.3 1999.4,2336.3 ; 1993.7,2340.2 1999.4,2340.2 ; 1994,2329.7 1999.4,2329.7 ; 1994,2336.6 1999.1,2336.6 ; 1994,2339.9 1999.1,2339.9 ; 1994,2346.8 1999.4,2346.8 ; 1994.3,2329.4 1998.8,2329.4 ; 1994.3,2347.1 1998.8,2347.1 ; 1994.3,2353.4 2003,2353.4 ; 1994.3,2353.7 2003,2353.7 ; 1994.3,2354 2003,2354 ; 1994.3,2354.3 2003,2354.3 ; 1994.6,2336.9 1998.5,2336.9 ; 1994.6,2339.6 1998.8,2339.6 ; 1994.6,2352.2 2002.7,2352.2 ; 1994.6,2352.5 2002.7,2352.5 ; 1994.6,2352.8 2003,2352.8 ; 1994.6,2353.1 2003,2353.1 ; 1994.6,2354.6 2003,2354.6 ; 1994.6,2354.9 2002.7,2354.9 ; 1994.6,2355.2 2002.7,2355.2 ; 1994.6,2458.4 2108.9,2458.4 ; 1994.9,2329.1 1998.2,2329.1 ; 1994.9,2347.4 1998.2,2347.4 ; 1994.9,2351.6 2002.4,2351.6 ; 1994.9,2351.9 2002.7,2351.9 ; 1994.9,2355.5 2002.7,2355.5 ; 1994.9,2355.8 2002.4,2355.8 ; 1995.2,2337.2 1997.9,2337.2 ; 1995.2,2339.3 1997.9,2339.3 ; 1995.2,2351 2002.1,2351 ; 1995.2,2351.3 2002.4,2351.3 ; 1995.2,2356.1 2002.4,2356.1 ; 1995.2,2356.4 2002.1,2356.4 ; 1995.5,2350.7 2001.8,2350.7 ; 1995.5,2356.7 2001.8,2356.7 ; 1995.8,2350.4 2001.5,2350.4 ; 1995.8,2357 2001.5,2357 ; 1996.1,2458.1 2106.8,2458.1 ; 1996.1,2480.3 2070.5,2480.3 ; 1996.4,2350.1 2001.2,2350.1 ; 1996.4,2357.3 2001.2,2357.3 ; 1996.7,2349.8 2000.6,2349.8 ; 1996.7,2357.6 2000.6,2357.6 ; 1997.3,2457.8 2105,2457.8 ; 1997.6,2357.9 1999.7,2357.9 ; 1997.9,2349.5 1999.7,2349.5 ; 1998.5,2363 2006.9,2363 ; 1998.5,2363.3 2006.9,2363.3 ; 1998.5,2363.6 2006.9,2363.6 ; 1998.5,2363.9 2006.9,2363.9 ; 1998.5,2364.2 2006.9,2364.2 ; 1998.5,2364.5 2006.9,2364.5 ; 1998.5,2364.8 2006.9,2364.8 ; 1998.5,2365.1 2006.9,2365.1 ; 1998.8,2314.4 2001.2,2314.4 ; 1998.8,2362.1 2006.6,2362.1 ; 1998.8,2362.4 2006.9,2362.4 ; 1998.8,2362.7 2006.9,2362.7 ; 1998.8,2365.4 2006.9,2365.4 ; 1998.8,2365.7 2006.9,2365.7 ; 1998.8,2366 2006.6,2366 ; 1998.8,2457.5 2102.9,2457.5 ; 1999.1,2361.8 2006.6,2361.8 ; 1999.1,2366.3 2006.6,2366.3 ; 1999.4,2361.2 2006,2361.2 ; 1999.4,2361.5 2006.3,2361.5 ; 1999.4,2366.6 2006.3,2366.6 ; 1999.7,2314.1 2001.2,2314.1 ; 1999.7,2315.6 2001.2,2315.6 ; 1999.7,2360.9 2005.7,2360.9 ; 1999.7,2366.9 2006,2366.9 ; 1999.7,2480.6 2072,2480.6 ; 2000,2313.8 2001.2,2313.8 ; 2000,2315.9 2001.2,2315.9 ; 2000,2360.6 2005.4,2360.6 ; 2000,2367.2 2005.7,2367.2 ; 2000.3,2309 2002.7,2309 ; 2000.3,2312.6 2001.2,2312.6 ; 2000.3,2312.9 2001.2,2312.9 ; 2000.3,2313.2 2001.2,2313.2 ; 2000.3,2313.5 2001.2,2313.5 ; 2000.3,2316.2 2001.2,2316.2 ; 2000.3,2316.5 2001.2,2316.5 ; 2000.3,2316.8 2001.2,2316.8 ; 2000.3,2317.1 2001.2,2317.1 ; 2000.3,2367.5 2005.4,2367.5 ; 2000.3,2457.2 2101.1,2457.2 ; 2000.6,2360.3 2005.1,2360.3 ; 2000.6,2367.8 2004.8,2367.8 ; 2000.9,2309.3 2002.7,2309.3 ; 2000.9,2320.1 2002.1,2320.1 ; 2001.2,2319.5 2002.4,2319.5 ; 2001.2,2319.8 2002.4,2319.8 ; 2001.2,2360 2004.2,2360 ; 2001.2,2368.1 2004.2,2368.1 ; 2001.5,2309.6 2002.7,2309.6 ; 2001.5,2318.3 2002.4,2318.3 ; 2001.5,2318.6 2002.4,2318.6 ; 2001.5,2318.9 2002.4,2318.9 ; 2001.5,2319.2 2002.4,2319.2 ; 2001.8,2309.9 2003,2309.9 ; 2001.8,2310.2 2003,2310.2 ; 2001.8,2456.9 2098.7,2456.9 ; 2002.1,2310.5 2003,2310.5 ; 2002.4,2310.8 2003.3,2310.8 ; 2002.4,2311.1 2003.3,2311.1 ; 2002.7,2311.4 2003.3,2311.4 ; 2002.7,2342 2011.1,2342 ; 2002.7,2342.3 2011.1,2342.3 ; 2002.7,2342.6 2011.1,2342.6 ; 2002.7,2342.9 2011.1,2342.9 ; 2002.7,2343.2 2011.1,2343.2 ; 2002.7,2343.5 2011.1,2343.5 ; 2002.7,2343.8 2011.1,2343.8 ; 2002.7,2344.1 2011.1,2344.1 ; 2002.7,2344.4 2011.1,2344.4 ; 2002.7,2344.7 2011.1,2344.7 ; 2002.7,2373.2 2011.1,2373.2 ; 2002.7,2373.5 2011.1,2373.5 ; 2002.7,2373.8 2011.1,2373.8 ; 2002.7,2374.1 2011.1,2374.1 ; 2002.7,2374.4 2011.1,2374.4 ; 2002.7,2374.7 2011.1,2374.7 ; 2002.7,2375 2011.1,2375 ; 2002.7,2375.3 2011.1,2375.3 ; 2002.7,2375.6 2011.1,2375.6 ; 2003,2341.4 2010.8,2341.4 ; 2003,2341.7 2010.8,2341.7 ; 2003,2345 2010.8,2345 ; 2003,2345.3 2010.8,2345.3 ; 2003,2372.3 2010.8,2372.3 ; 2003,2372.6 2010.8,2372.6 ; 2003,2372.9 2011.1,2372.9 ; 2003,2375.9 2011.1,2375.9 ; 2003,2376.2 2010.8,2376.2 ; 2003,2376.5 2010.8,2376.5 ; 2003,2480.9 2073.2,2480.9 ; 2003.3,2340.8 2010.5,2340.8 ; 2003.3,2341.1 2010.5,2341.1 ; 2003.3,2345.6 2010.5,2345.6 ; 2003.3,2345.9 2010.5,2345.9 ; 2003.3,2372 2010.5,2372 ; 2003.3,2376.8 2010.5,2376.8 ; 2003.3,2456.6 2096.6,2456.6 ; 2003.6,2340.5 2010.2,2340.5 ; 2003.6,2346.2 2010.2,2346.2 ; 2003.6,2371.7 2010.2,2371.7 ; 2003.6,2377.1 2010.2,2377.1 ; 2003.9,2340.2 2009.9,2340.2 ; 2003.9,2346.5 2009.9,2346.5 ; 2003.9,2371.4 2010.2,2371.4 ; 2003.9,2377.4 2009.9,2377.4 ; 2004.2,2339.9 2009.6,2339.9 ; 2004.2,2346.8 2009.6,2346.8 ; 2004.2,2371.1 2009.9,2371.1 ; 2004.2,2377.7 2009.6,2377.7 ; 2004.5,2370.8 2009.3,2370.8 ; 2004.5,2378 2009.3,2378 ; 2004.8,2339.6 2009,2339.6 ; 2004.8,2347.1 2009.3,2347.1 ; 2005.1,2347.4 2008.7,2347.4 ; 2005.1,2370.5 2009,2370.5 ; 2005.1,2378.3 2008.7,2378.3 ; 2005.1,2456.3 2094.5,2456.3 ; 2005.4,2339.3 2008.4,2339.3 ; 2005.7,2370.2 2008.1,2370.2 ; 2005.7,2481.2 2074.7,2481.2 ; 2006,2378.6 2007.8,2378.6 ; 2006.6,2456 2092.1,2456 ; 2008.1,2481.5 2075.9,2481.5 ; 2008.4,2455.7 2089.7,2455.7 ; 2010.2,2481.8 2077.1,2481.8 ; 2010.5,2455.4 2087,2455.4 ; 2012,2321 2018,2321 ; 2012,2321.3 2018,2321.3 ; 2012.3,2482.1 2078.3,2482.1 ; 2012.9,2320.7 2017.1,2320.7 ; 2012.9,2342.3 2021.3,2342.3 ; 2012.9,2342.6 2021.3,2342.6 ; 2012.9,2342.9 2021.3,2342.9 ; 2012.9,2343.2 2021.3,2343.2 ; 2012.9,2343.5 2021.3,2343.5 ; 2012.9,2343.8 2021.3,2343.8 ; 2012.9,2344.1 2021.3,2344.1 ; 2012.9,2344.4 2021.3,2344.4 ; 2012.9,2373.2 2021.3,2373.2 ; 2012.9,2373.5 2021.3,2373.5 ; 2012.9,2373.8 2021.3,2373.8 ; 2012.9,2374.1 2021.3,2374.1 ; 2012.9,2374.4 2021.3,2374.4 ; 2012.9,2374.7 2021.3,2374.7 ; 2012.9,2375 2021.3,2375 ; 2012.9,2375.3 2021.3,2375.3 ; 2012.9,2375.6 2021.3,2375.6 ; 2012.9,2455.1 2084.3,2455.1 ; 2013.2,2341.4 2021,2341.4 ; 2013.2,2341.7 2021,2341.7 ; 2013.2,2342 2021.3,2342 ; 2013.2,2344.7 2021.3,2344.7 ; 2013.2,2345 2021.3,2345 ; 2013.2,2345.3 2021,2345.3 ; 2013.2,2372.6 2021,2372.6 ; 2013.2,2372.9 2021.3,2372.9 ; 2013.2,2375.9 2021.3,2375.9 ; 2013.2,2376.2 2021,2376.2 ; 2013.5,2309 2016.8,2309 ; 2013.5,2320.1 2016.2,2320.1 ; 2013.5,2320.4 2016.5,2320.4 ; 2013.5,2341.1 2020.7,2341.1 ; 2013.5,2345.6 2021,2345.6 ; 2013.5,2345.9 2020.7,2345.9 ; 2013.5,2372 2020.7,2372 ; 2013.5,2372.3 2021,2372.3 ; 2013.5,2376.5 2021,2376.5 ; 2013.5,2376.8 2020.7,2376.8 ; 2013.8,2309.3 2016.2,2309.3 ; 2013.8,2309.6 2015.9,2309.6 ; 2013.8,2309.9 2015.9,2309.9 ; 2013.8,2310.2 2015.9,2310.2 ; 2013.8,2310.5 2015.9,2310.5 ; 2013.8,2310.8 2015.9,2310.8 ; 2013.8,2311.1 2015.9,2311.1 ; 2013.8,2311.4 2015.9,2311.4 ; 2013.8,2311.7 2015.9,2311.7 ; 2013.8,2312 2015.9,2312 ; 2013.8,2312.3 2015.9,2312.3 ; 2013.8,2312.6 2015.9,2312.6 ; 2013.8,2312.9 2015.9,2312.9 ; 2013.8,2313.2 2015.9,2313.2 ; 2013.8,2313.5 2015.9,2313.5 ; 2013.8,2313.8 2015.9,2313.8 ; 2013.8,2314.1 2015.9,2314.1 ; 2013.8,2314.4 2015.9,2314.4 ; 2013.8,2314.7 2015.9,2314.7 ; 2013.8,2315 2015.9,2315 ; 2013.8,2315.3 2015.9,2315.3 ; 2013.8,2315.6 2015.9,2315.6 ; 2013.8,2315.9 2015.9,2315.9 ; 2013.8,2316.2 2015.9,2316.2 ; 2013.8,2316.5 2015.9,2316.5 ; 2013.8,2316.8 2015.9,2316.8 ; 2013.8,2317.1 2015.9,2317.1 ; 2013.8,2317.4 2015.9,2317.4 ; 2013.8,2317.7 2015.9,2317.7 ; 2013.8,2318 2015.9,2318 ; 2013.8,2318.3 2015.9,2318.3 ; 2013.8,2318.6 2015.9,2318.6 ; 2013.8,2318.9 2015.9,2318.9 ; 2013.8,2319.2 2015.9,2319.2 ; 2013.8,2319.5 2015.9,2319.5 ; 2013.8,2319.8 2015.9,2319.8 ; 2013.8,2340.5 2020.4,2340.5 ; 2013.8,2340.8 2020.7,2340.8 ; 2013.8,2346.2 2020.4,2346.2 ; 2013.8,2371.7 2020.7,2371.7 ; 2013.8,2377.1 2020.4,2377.1 ; 2014.1,2340.2 2020.1,2340.2 ; 2014.1,2346.5 2020.1,2346.5 ; 2014.1,2371.4 2020.4,2371.4 ; 2014.1,2377.4 2020.4,2377.4 ; 2014.4,2346.8 2019.8,2346.8 ; 2014.4,2371.1 2020.1,2371.1 ; 2014.4,2377.7 2020.1,2377.7 ; 2014.4,2482.4 2079.5,2482.4 ; 2014.7,2339.9 2019.8,2339.9 ; 2014.7,2370.8 2019.5,2370.8 ; 2014.7,2378 2019.5,2378 ; 2015,2339.6 2019.2,2339.6 ; 2015,2347.1 2019.5,2347.1 ; 2015.3,2370.5 2019.2,2370.5 ; 2015.3,2378.3 2018.9,2378.3 ; 2015.6,2347.4 2018.9,2347.4 ; 2015.9,2339.3 2018.6,2339.3 ; 2015.9,2454.8 2081.3,2454.8 ; 2016.2,2370.2 2018.3,2370.2 ; 2016.2,2378.6 2018,2378.6 ; 2016.2,2482.7 2080.7,2482.7 ; 2018,2483 2081.9,2483 ; 2018.9,2454.5 2078,2454.5 ; 2019.8,2309 2022.8,2309 ; 2019.8,2483.3 2083.1,2483.3 ; 2021,2309.3 2022.8,2309.3 ; 2021.6,2309.6 2022.8,2309.6 ; 2021.6,2483.6 2084,2483.6 ; 2021.9,2309.9 2023.1,2309.9 ; 2022.2,2310.2 2023.1,2310.2 ; 2022.2,2310.5 2023.1,2310.5 ; 2022.2,2454.2 2074.4,2454.2 ; 2022.5,2310.8 2023.4,2310.8 ; 2022.5,2311.1 2023.4,2311.1 ; 2022.8,2311.4 2023.4,2311.4 ; 2022.8,2311.7 2023.4,2311.7 ; 2023.1,2339.3 2050.1,2339.3 ; 2023.1,2339.6 2050.1,2339.6 ; 2023.1,2339.9 2049.8,2339.9 ; 2023.1,2340.2 2049.8,2340.2 ; 2023.1,2340.5 2049.5,2340.5 ; 2023.1,2340.8 2049.5,2340.8 ; 2023.1,2341.1 2049.2,2341.1 ; 2023.1,2341.4 2049.2,2341.4 ; 2023.1,2341.7 2048.9,2341.7 ; 2023.1,2342 2048.9,2342 ; 2023.1,2342.3 2048.6,2342.3 ; 2023.1,2342.6 2048.6,2342.6 ; 2023.1,2342.9 2048.3,2342.9 ; 2023.1,2343.2 2048.3,2343.2 ; 2023.1,2343.5 2048,2343.5 ; 2023.1,2343.8 2048,2343.8 ; 2023.1,2344.1 2047.7,2344.1 ; 2023.1,2344.4 2047.7,2344.4 ; 2023.1,2344.7 2047.4,2344.7 ; 2023.1,2345 2047.4,2345 ; 2023.1,2345.3 2047.1,2345.3 ; 2023.1,2345.6 2047.1,2345.6 ; 2023.1,2345.9 2046.8,2345.9 ; 2023.1,2346.2 2046.8,2346.2 ; 2023.1,2346.5 2046.5,2346.5 ; 2023.1,2346.8 2046.5,2346.8 ; 2023.1,2347.1 2046.2,2347.1 ; 2023.1,2347.4 2046.2,2347.4 ; 2023.1,2370.2 2034.8,2370.2 ; 2023.1,2370.5 2034.8,2370.5 ; 2023.1,2370.8 2034.5,2370.8 ; 2023.1,2371.1 2034.5,2371.1 ; 2023.1,2371.4 2034.2,2371.4 ; 2023.1,2371.7 2034.2,2371.7 ; 2023.1,2372 2033.9,2372 ; 2023.1,2372.3 2033.9,2372.3 ; 2023.1,2372.6 2033.6,2372.6 ; 2023.1,2372.9 2033.6,2372.9 ; 2023.1,2373.2 2033.3,2373.2 ; 2023.1,2373.5 2033.3,2373.5 ; 2023.1,2373.8 2033,2373.8 ; 2023.1,2374.1 2033,2374.1 ; 2023.1,2374.4 2032.7,2374.4 ; 2023.1,2374.7 2032.7,2374.7 ; 2023.1,2375 2032.4,2375 ; 2023.1,2375.3 2032.4,2375.3 ; 2023.1,2375.6 2032.1,2375.6 ; 2023.1,2375.9 2032.1,2375.9 ; 2023.1,2376.2 2031.8,2376.2 ; 2023.1,2376.5 2031.8,2376.5 ; 2023.1,2376.8 2031.8,2376.8 ; 2023.1,2377.1 2031.8,2377.1 ; 2023.1,2377.4 2031.8,2377.4 ; 2023.1,2377.7 2031.8,2377.7 ; 2023.1,2378 2031.8,2378 ; 2023.1,2378.3 2031.8,2378.3 ; 2023.1,2378.6 2031.8,2378.6 ; 2023.1,2483.9 2085.2,2483.9 ; 2024.3,2369.6 2035.1,2369.6 ; 2024.3,2369.9 2035.1,2369.9 ; 2024.6,2369 2035.4,2369 ; 2024.6,2369.3 2035.4,2369.3 ; 2024.9,2368.4 2035.7,2368.4 ; 2024.9,2368.7 2035.7,2368.7 ; 2024.9,2484.2 2086.4,2484.2 ; 2025.2,2367.8 2036,2367.8 ; 2025.2,2368.1 2036,2368.1 ; 2025.5,2367.2 2036.3,2367.2 ; 2025.5,2367.5 2036.3,2367.5 ; 2025.8,2366.6 2036.6,2366.6 ; 2025.8,2366.9 2036.6,2366.9 ; 2026.1,2366 2036.9,2366 ; 2026.1,2366.3 2036.9,2366.3 ; 2026.4,2365.4 2037.2,2365.4 ; 2026.4,2365.7 2037.2,2365.7 ; 2026.4,2453.9 2070.5,2453.9 ; 2026.4,2484.5 2087.3,2484.5 ; 2026.7,2364.8 2037.5,2364.8 ; 2026.7,2365.1 2037.5,2365.1 ; 2027,2364.2 2037.8,2364.2 ; 2027,2364.5 2037.8,2364.5 ; 2027.3,2363.6 2038.1,2363.6 ; 2027.3,2363.9 2038.1,2363.9 ; 2027.6,2363 2038.4,2363 ; 2027.6,2363.3 2038.4,2363.3 ; 2027.9,2362.4 2038.7,2362.4 ; 2027.9,2362.7 2038.7,2362.7 ; 2028.2,2361.8 2039,2361.8 ; 2028.2,2362.1 2039,2362.1 ; 2028.2,2484.8 2088.5,2484.8 ; 2028.5,2361.2 2039.3,2361.2 ; 2028.5,2361.5 2039.3,2361.5 ; 2028.8,2360.6 2039.6,2360.6 ; 2028.8,2360.9 2039.6,2360.9 ; 2029.1,2360 2039.9,2360 ; 2029.1,2360.3 2039.9,2360.3 ; 2029.4,2359.4 2040.2,2359.4 ; 2029.4,2359.7 2040.2,2359.7 ; 2029.7,2358.8 2040.5,2358.8 ; 2029.7,2359.1 2040.5,2359.1 ; 2029.7,2485.1 2089.4,2485.1 ; 2030,2358.2 2040.8,2358.2 ; 2030,2358.5 2040.8,2358.5 ; 2030.3,2357.6 2041.1,2357.6 ; 2030.3,2357.9 2041.1,2357.9 ; 2030.6,2357 2041.4,2357 ; 2030.6,2357.3 2041.4,2357.3 ; 2030.9,2356.4 2041.7,2356.4 ; 2030.9,2356.7 2041.7,2356.7 ; 2031.2,2355.8 2042,2355.8 ; 2031.2,2356.1 2042,2356.1 ; 2031.2,2453.6 2065.4,2453.6 ; 2031.5,2355.2 2042.3,2355.2 ; 2031.5,2355.5 2042.3,2355.5 ; 2031.5,2485.4 2090.3,2485.4 ; 2031.8,2354.6 2042.6,2354.6 ; 2031.8,2354.9 2042.6,2354.9 ; 2032.1,2321 2042.6,2321 ; 2032.1,2321.3 2042.6,2321.3 ; 2032.1,2354 2042.9,2354 ; 2032.1,2354.3 2042.9,2354.3 ; 2032.4,2353.4 2043.2,2353.4 ; 2032.4,2353.7 2043.2,2353.7 ; 2032.7,2352.8 2043.5,2352.8 ; 2032.7,2353.1 2043.5,2353.1 ; 2033,2320.7 2042.6,2320.7 ; 2033,2352.2 2043.8,2352.2 ; 2033,2352.5 2043.8,2352.5 ; 2033,2485.7 2091.5,2485.7 ; 2033.3,2351.6 2044.1,2351.6 ; 2033.3,2351.9 2044.1,2351.9 ; 2033.6,2309 2036.3,2309 ; 2033.6,2320.4 2042.6,2320.4 ; 2033.6,2351 2044.4,2351 ; 2033.6,2351.3 2044.4,2351.3 ; 2033.9,2309.3 2036.3,2309.3 ; 2033.9,2309.6 2036,2309.6 ; 2033.9,2309.9 2036,2309.9 ; 2033.9,2310.2 2036,2310.2 ; 2033.9,2310.5 2036,2310.5 ; 2033.9,2310.8 2036,2310.8 ; 2033.9,2311.1 2036,2311.1 ; 2033.9,2311.4 2036,2311.4 ; 2033.9,2311.7 2036,2311.7 ; 2033.9,2312 2036,2312 ; 2033.9,2312.3 2036,2312.3 ; 2033.9,2312.6 2036,2312.6 ; 2033.9,2312.9 2036,2312.9 ; 2033.9,2313.2 2036,2313.2 ; 2033.9,2313.5 2036,2313.5 ; 2033.9,2313.8 2036,2313.8 ; 2033.9,2314.1 2036,2314.1 ; 2033.9,2314.4 2036,2314.4 ; 2033.9,2314.7 2041.4,2314.7 ; 2033.9,2315 2041.4,2315 ; 2033.9,2315.3 2041.4,2315.3 ; 2033.9,2315.6 2036,2315.6 ; 2033.9,2315.9 2036,2315.9 ; 2033.9,2316.2 2036,2316.2 ; 2033.9,2316.5 2036,2316.5 ; 2033.9,2316.8 2036,2316.8 ; 2033.9,2317.1 2036,2317.1 ; 2033.9,2317.4 2036,2317.4 ; 2033.9,2317.7 2036,2317.7 ; 2033.9,2318 2036,2318 ; 2033.9,2318.3 2036,2318.3 ; 2033.9,2318.6 2036,2318.6 ; 2033.9,2318.9 2036,2318.9 ; 2033.9,2319.2 2036,2319.2 ; 2033.9,2319.5 2036,2319.5 ; 2033.9,2319.8 2036,2319.8 ; 2033.9,2320.1 2036,2320.1 ; 2033.9,2350.4 2044.7,2350.4 ; 2033.9,2350.7 2044.7,2350.7 ; 2034.2,2349.8 2045,2349.8 ; 2034.2,2350.1 2045,2350.1 ; 2034.5,2349.2 2045.3,2349.2 ; 2034.5,2349.5 2045.3,2349.5 ; 2034.8,2348.6 2045.6,2348.6 ; 2034.8,2348.9 2045.6,2348.9 ; 2034.8,2486 2092.4,2486 ; 2035.1,2348 2045.9,2348 ; 2035.1,2348.3 2045.6,2348.3 ; 2035.4,2347.7 2045.9,2347.7 ; 2036.3,2486.3 2093.3,2486.3 ; 2037.8,2461.4 2125.7,2461.4 ; 2037.8,2486.6 2094.2,2486.6 ; 2038.4,2453.3 2058.2,2453.3 ; 2039,2314.4 2041.4,2314.4 ; 2039.3,2486.9 2095.1,2486.9 ; 2039.6,2339 2050.4,2339 ; 2039.9,2315.6 2041.4,2315.6 ; 2039.9,2338.4 2050.7,2338.4 ; 2039.9,2338.7 2050.4,2338.7 ; 2040.2,2314.1 2041.4,2314.1 ; 2040.2,2315.9 2041.4,2315.9 ; 2040.2,2337.8 2051,2337.8 ; 2040.2,2338.1 2050.7,2338.1 ; 2040.5,2309 2042.9,2309 ; 2040.5,2313.2 2041.4,2313.2 ; 2040.5,2313.5 2041.4,2313.5 ; 2040.5,2313.8 2041.4,2313.8 ; 2040.5,2316.2 2041.4,2316.2 ; 2040.5,2316.5 2041.4,2316.5 ; 2040.5,2337.2 2051.3,2337.2 ; 2040.5,2337.5 2051,2337.5 ; 2040.8,2312.6 2041.4,2312.6 ; 2040.8,2312.9 2041.4,2312.9 ; 2040.8,2316.8 2041.4,2316.8 ; 2040.8,2317.1 2041.4,2317.1 ; 2040.8,2336.6 2051.6,2336.6 ; 2040.8,2336.9 2051.3,2336.9 ; 2040.8,2487.2 2096,2487.2 ; 2041.1,2320.1 2042.6,2320.1 ; 2041.1,2336 2051.9,2336 ; 2041.1,2336.3 2051.6,2336.3 ; 2041.4,2309.3 2042.9,2309.3 ; 2041.4,2319.8 2042.6,2319.8 ; 2041.4,2335.4 2052.2,2335.4 ; 2041.4,2335.7 2051.9,2335.7 ; 2041.7,2309.6 2043.2,2309.6 ; 2041.7,2318.9 2042.6,2318.9 ; 2041.7,2319.2 2042.6,2319.2 ; 2041.7,2319.5 2042.6,2319.5 ; 2041.7,2334.8 2052.2,2334.8 ; 2041.7,2335.1 2052.2,2335.1 ; 2042,2309.9 2043.2,2309.9 ; 2042,2318.3 2042.6,2318.3 ; 2042,2318.6 2042.6,2318.6 ; 2042,2334.2 2052.2,2334.2 ; 2042,2334.5 2052.2,2334.5 ; 2042.3,2310.2 2043.2,2310.2 ; 2042.3,2310.5 2043.5,2310.5 ; 2042.3,2333.6 2052.2,2333.6 ; 2042.3,2333.9 2052.2,2333.9 ; 2042.3,2487.5 2096.9,2487.5 ; 2042.6,2310.8 2043.5,2310.8 ; 2042.6,2311.1 2043.5,2311.1 ; 2042.6,2333 2052.2,2333 ; 2042.6,2333.3 2052.2,2333.3 ; 2042.9,2311.4 2043.5,2311.4 ; 2042.9,2332.4 2052.2,2332.4 ; 2042.9,2332.7 2052.2,2332.7 ; 2043.2,2331.8 2052.2,2331.8 ; 2043.2,2332.1 2052.2,2332.1 ; 2043.5,2331.2 2052.2,2331.2 ; 2043.5,2331.5 2052.2,2331.5 ; 2043.8,2328.8 2052.2,2328.8 ; 2043.8,2329.1 2052.2,2329.1 ; 2043.8,2329.4 2052.2,2329.4 ; 2043.8,2329.7 2052.2,2329.7 ; 2043.8,2330 2052.2,2330 ; 2043.8,2330.3 2052.2,2330.3 ; 2043.8,2330.6 2052.2,2330.6 ; 2043.8,2330.9 2052.2,2330.9 ; 2043.8,2487.8 2097.8,2487.8 ; 2044.4,2573 2044.7,2573 ; 2044.4,2573.3 2045,2573.3 ; 2044.4,2573.6 2045.3,2573.6 ; 2044.4,2573.9 2045.6,2573.9 ; 2044.7,2574.2 2045.6,2574.2 ; 2044.7,2574.5 2045.9,2574.5 ; 2044.7,2574.8 2046.2,2574.8 ; 2044.7,2575.1 2046.2,2575.1 ; 2045,2488.1 2098.7,2488.1 ; 2045,2575.4 2046.5,2575.4 ; 2045,2575.7 2046.8,2575.7 ; 2045,2576 2046.8,2576 ; 2045.3,2576.3 2047.1,2576.3 ; 2045.3,2576.6 2047.4,2576.6 ; 2045.3,2576.9 2047.4,2576.9 ; 2045.6,2461.7 2127.5,2461.7 ; 2045.6,2577.2 2047.7,2577.2 ; 2045.6,2577.5 2048,2577.5 ; 2045.6,2577.8 2048,2577.8 ; 2045.9,2578.1 2048.3,2578.1 ; 2045.9,2578.4 2048.3,2578.4 ; 2045.9,2578.7 2048.6,2578.7 ; 2046.2,2579 2048.9,2579 ; 2046.2,2579.3 2048.9,2579.3 ; 2046.5,2488.4 2099.3,2488.4 ; 2046.5,2579.6 2049.2,2579.6 ; 2046.5,2579.9 2049.2,2579.9 ; 2046.8,2580.2 2049.5,2580.2 ; 2046.8,2580.5 2049.8,2580.5 ; 2046.8,2580.8 2049.8,2580.8 ; 2047.1,2581.1 2050.1,2581.1 ; 2047.1,2581.4 2050.1,2581.4 ; 2047.4,2581.7 2050.4,2581.7 ; 2047.4,2582 2050.7,2582 ; 2047.7,2488.7 2100.2,2488.7 ; 2047.7,2582.3 2050.7,2582.3 ; 2047.7,2582.6 2051,2582.6 ; 2048,2582.9 2051.3,2582.9 ; 2048,2583.2 2051.3,2583.2 ; 2048.3,2583.5 2051.6,2583.5 ; 2048.3,2583.8 2051.6,2583.8 ; 2048.6,2584.1 2051.9,2584.1 ; 2048.6,2584.4 2052.2,2584.4 ; 2048.9,2584.7 2052.2,2584.7 ; 2049.2,2489 2101.1,2489 ; 2049.2,2585 2052.5,2585 ; 2049.2,2585.3 2052.8,2585.3 ; 2049.5,2585.6 2052.8,2585.6 ; 2049.5,2585.9 2053.1,2585.9 ; 2049.8,2586.2 2053.4,2586.2 ; 2049.8,2586.5 2053.4,2586.5 ; 2050.1,2586.8 2053.7,2586.8 ; 2050.4,2489.3 2101.7,2489.3 ; 2050.4,2587.1 2054,2587.1 ; 2050.4,2587.4 2054,2587.4 ; 2050.7,2587.7 2054.3,2587.7 ; 2050.7,2588 2054.6,2588 ; 2051,2462 2129,2462 ; 2051,2588.3 2054.6,2588.3 ; 2051.3,2588.6 2054.9,2588.6 ; 2051.3,2588.9 2055.2,2588.9 ; 2051.6,2489.6 2102.6,2489.6 ; 2051.6,2589.2 2055.2,2589.2 ; 2051.6,2589.5 2055.5,2589.5 ; 2051.9,2589.8 2055.8,2589.8 ; 2052.2,2590.1 2056.1,2590.1 ; 2052.2,2590.4 2056.1,2590.4 ; 2052.5,2312.9 2055.2,2312.9 ; 2052.5,2313.2 2055.2,2313.2 ; 2052.5,2313.5 2055.2,2313.5 ; 2052.5,2313.8 2054.9,2313.8 ; 2052.5,2314.1 2054.9,2314.1 ; 2052.5,2314.4 2054.9,2314.4 ; 2052.5,2314.7 2054.9,2314.7 ; 2052.5,2315 2054.9,2315 ; 2052.5,2315.3 2055.2,2315.3 ; 2052.5,2315.6 2055.2,2315.6 ; 2052.5,2315.9 2055.2,2315.9 ; 2052.5,2590.7 2056.4,2590.7 ; 2052.8,2311.7 2055.5,2311.7 ; 2052.8,2312 2055.2,2312 ; 2052.8,2312.3 2055.2,2312.3 ; 2052.8,2312.6 2055.2,2312.6 ; 2052.8,2316.2 2055.2,2316.2 ; 2052.8,2316.5 2055.2,2316.5 ; 2052.8,2316.8 2055.2,2316.8 ; 2052.8,2317.1 2055.5,2317.1 ; 2052.8,2591 2056.7,2591 ; 2052.8,2591.3 2057,2591.3 ; 2053.1,2311.1 2055.8,2311.1 ; 2053.1,2311.4 2055.5,2311.4 ; 2053.1,2317.4 2055.5,2317.4 ; 2053.1,2317.7 2055.5,2317.7 ; 2053.1,2489.9 2103.2,2489.9 ; 2053.1,2591.6 2057,2591.6 ; 2053.4,2310.5 2056.1,2310.5 ; 2053.4,2310.8 2055.8,2310.8 ; 2053.4,2318 2055.8,2318 ; 2053.4,2318.3 2055.8,2318.3 ; 2053.4,2591.9 2057.3,2591.9 ; 2053.4,2592.2 2057.6,2592.2 ; 2053.7,2310.2 2056.4,2310.2 ; 2053.7,2318.6 2056.1,2318.6 ; 2053.7,2318.9 2056.1,2318.9 ; 2053.7,2592.5 2057.9,2592.5 ; 2054,2309.6 2057,2309.6 ; 2054,2309.9 2056.7,2309.9 ; 2054,2319.2 2056.4,2319.2 ; 2054,2592.8 2057.9,2592.8 ; 2054,2593.1 2058.2,2593.1 ; 2054.3,2309.3 2057.3,2309.3 ; 2054.3,2319.5 2056.7,2319.5 ; 2054.3,2490.2 2104.1,2490.2 ; 2054.3,2593.4 2058.5,2593.4 ; 2054.6,2309 2057.9,2309 ; 2054.6,2319.8 2057,2319.8 ; 2054.6,2593.7 2058.8,2593.7 ; 2054.6,2594 2058.8,2594 ; 2054.9,2320.1 2057.3,2320.1 ; 2054.9,2594.3 2059.1,2594.3 ; 2055.2,2320.4 2057.9,2320.4 ; 2055.2,2594.6 2059.4,2594.6 ; 2055.2,2594.9 2059.7,2594.9 ; 2055.5,2462.3 2130.5,2462.3 ; 2055.5,2490.5 2104.7,2490.5 ; 2055.5,2595.2 2060,2595.2 ; 2055.8,2320.7 2059.1,2320.7 ; 2055.8,2595.5 2060,2595.5 ; 2056.1,2321 2062.4,2321 ; 2056.1,2331.8 2064.5,2331.8 ; 2056.1,2332.1 2064.5,2332.1 ; 2056.1,2332.4 2064.5,2332.4 ; 2056.1,2332.7 2064.5,2332.7 ; 2056.1,2333 2064.5,2333 ; 2056.1,2333.3 2064.5,2333.3 ; 2056.1,2333.6 2064.5,2333.6 ; 2056.1,2333.9 2064.5,2333.9 ; 2056.1,2334.2 2064.5,2334.2 ; 2056.1,2334.5 2064.5,2334.5 ; 2056.1,2342 2064.5,2342 ; 2056.1,2342.3 2064.5,2342.3 ; 2056.1,2342.6 2064.5,2342.6 ; 2056.1,2342.9 2064.5,2342.9 ; 2056.1,2343.2 2064.5,2343.2 ; 2056.1,2343.5 2064.5,2343.5 ; 2056.1,2343.8 2064.5,2343.8 ; 2056.1,2344.1 2064.5,2344.1 ; 2056.1,2344.4 2064.5,2344.4 ; 2056.1,2344.7 2064.5,2344.7 ; 2056.1,2352.5 2064.5,2352.5 ; 2056.1,2352.8 2064.5,2352.8 ; 2056.1,2353.1 2064.5,2353.1 ; 2056.1,2353.4 2064.5,2353.4 ; 2056.1,2353.7 2064.5,2353.7 ; 2056.1,2354 2064.5,2354 ; 2056.1,2354.3 2064.5,2354.3 ; 2056.1,2354.6 2064.5,2354.6 ; 2056.1,2354.9 2064.5,2354.9 ; 2056.1,2362.7 2064.5,2362.7 ; 2056.1,2363 2064.5,2363 ; 2056.1,2363.3 2064.5,2363.3 ; 2056.1,2363.6 2064.5,2363.6 ; 2056.1,2363.9 2064.5,2363.9 ; 2056.1,2364.2 2064.5,2364.2 ; 2056.1,2364.5 2064.5,2364.5 ; 2056.1,2364.8 2064.5,2364.8 ; 2056.1,2365.1 2064.5,2365.1 ; 2056.1,2365.4 2064.5,2365.4 ; 2056.1,2373.2 2064.5,2373.2 ; 2056.1,2373.5 2064.5,2373.5 ; 2056.1,2373.8 2064.5,2373.8 ; 2056.1,2374.1 2064.5,2374.1 ; 2056.1,2374.4 2064.5,2374.4 ; 2056.1,2374.7 2064.5,2374.7 ; 2056.1,2375 2064.5,2375 ; 2056.1,2375.3 2064.5,2375.3 ; 2056.1,2375.6 2064.5,2375.6 ; 2056.1,2595.8 2060.3,2595.8 ; 2056.1,2596.1 2060.6,2596.1 ; 2056.4,2331.2 2064.2,2331.2 ; 2056.4,2331.5 2064.2,2331.5 ; 2056.4,2334.8 2064.2,2334.8 ; 2056.4,2335.1 2064.2,2335.1 ; 2056.4,2341.4 2064.2,2341.4 ; 2056.4,2341.7 2064.2,2341.7 ; 2056.4,2345 2064.2,2345 ; 2056.4,2345.3 2064.2,2345.3 ; 2056.4,2351.6 2064.2,2351.6 ; 2056.4,2351.9 2064.2,2351.9 ; 2056.4,2352.2 2064.5,2352.2 ; 2056.4,2355.2 2064.5,2355.2 ; 2056.4,2355.5 2064.2,2355.5 ; 2056.4,2355.8 2064.2,2355.8 ; 2056.4,2362.1 2064.2,2362.1 ; 2056.4,2362.4 2064.2,2362.4 ; 2056.4,2365.7 2064.2,2365.7 ; 2056.4,2366 2064.2,2366 ; 2056.4,2372.3 2064.2,2372.3 ; 2056.4,2372.6 2064.2,2372.6 ; 2056.4,2372.9 2064.5,2372.9 ; 2056.4,2375.9 2064.2,2375.9 ; 2056.4,2376.2 2064.2,2376.2 ; 2056.4,2376.5 2064.2,2376.5 ; 2056.4,2596.4 2060.9,2596.4 ; 2056.7,2321.3 2061.8,2321.3 ; 2056.7,2330.6 2063.9,2330.6 ; 2056.7,2330.9 2063.9,2330.9 ; 2056.7,2335.4 2063.9,2335.4 ; 2056.7,2340.8 2063.9,2340.8 ; 2056.7,2341.1 2063.9,2341.1 ; 2056.7,2345.6 2063.9,2345.6 ; 2056.7,2345.9 2063.9,2345.9 ; 2056.7,2351.3 2063.9,2351.3 ; 2056.7,2356.1 2063.9,2356.1 ; 2056.7,2361.5 2063.9,2361.5 ; 2056.7,2361.8 2063.9,2361.8 ; 2056.7,2366.3 2063.9,2366.3 ; 2056.7,2366.6 2063.9,2366.6 ; 2056.7,2372 2063.9,2372 ; 2056.7,2376.8 2063.9,2376.8 ; 2056.7,2490.8 2105.6,2490.8 ; 2056.7,2596.7 2061.2,2596.7 ; 2056.7,2597 2061.5,2597 ; 2057,2330.3 2063.6,2330.3 ; 2057,2335.7 2063.9,2335.7 ; 2057,2336 2063.6,2336 ; 2057,2340.5 2063.6,2340.5 ; 2057,2346.2 2063.6,2346.2 ; 2057,2351 2063.6,2351 ; 2057,2356.4 2063.6,2356.4 ; 2057,2361.2 2063.6,2361.2 ; 2057,2366.9 2063.6,2366.9 ; 2057,2371.7 2063.6,2371.7 ; 2057,2377.1 2063.6,2377.1 ; 2057,2597.3 2061.5,2597.3 ; 2057.3,2330 2063.3,2330 ; 2057.3,2336.3 2063.3,2336.3 ; 2057.3,2340.2 2063.3,2340.2 ; 2057.3,2346.5 2063.3,2346.5 ; 2057.3,2350.7 2063.3,2350.7 ; 2057.3,2356.7 2063.3,2356.7 ; 2057.3,2360.9 2063.3,2360.9 ; 2057.3,2367.2 2063.3,2367.2 ; 2057.3,2371.4 2063.6,2371.4 ; 2057.3,2377.4 2063.3,2377.4 ; 2057.3,2597.6 2061.8,2597.6 ; 2057.6,2329.7 2063,2329.7 ; 2057.6,2346.8 2063,2346.8 ; 2057.6,2350.4 2063,2350.4 ; 2057.6,2357 2063,2357 ; 2057.6,2360.6 2063,2360.6 ; 2057.6,2367.5 2063,2367.5 ; 2057.6,2371.1 2063,2371.1 ; 2057.6,2377.7 2063,2377.7 ; 2057.6,2597.9 2062.1,2597.9 ; 2057.6,2598.2 2062.4,2598.2 ; 2057.9,2321.6 2060.6,2321.6 ; 2057.9,2329.4 2062.7,2329.4 ; 2057.9,2336.6 2062.7,2336.6 ; 2057.9,2339.9 2063,2339.9 ; 2057.9,2350.1 2062.7,2350.1 ; 2057.9,2357.3 2062.7,2357.3 ; 2057.9,2370.8 2062.7,2370.8 ; 2057.9,2378 2062.7,2378 ; 2057.9,2491.1 2106.2,2491.1 ; 2057.9,2598.5 2062.7,2598.5 ; 2058.2,2336.9 2062.4,2336.9 ; 2058.2,2339.6 2062.4,2339.6 ; 2058.2,2347.1 2062.4,2347.1 ; 2058.2,2360.3 2062.4,2360.3 ; 2058.2,2367.8 2062.4,2367.8 ; 2058.2,2598.8 2063,2598.8 ; 2058.5,2329.1 2062.1,2329.1